# Altium PCB uc3c.PcbDoc
Units mil, origin at the board's own origin, x right, y up, seen from the top; angles counter-clockwise.
Board outline 1082.68 x 1574.8 mil, 2 copper layers (Top Layer, Bottom Layer); 34 components, 23 nets, 237 pads, 76 vias.
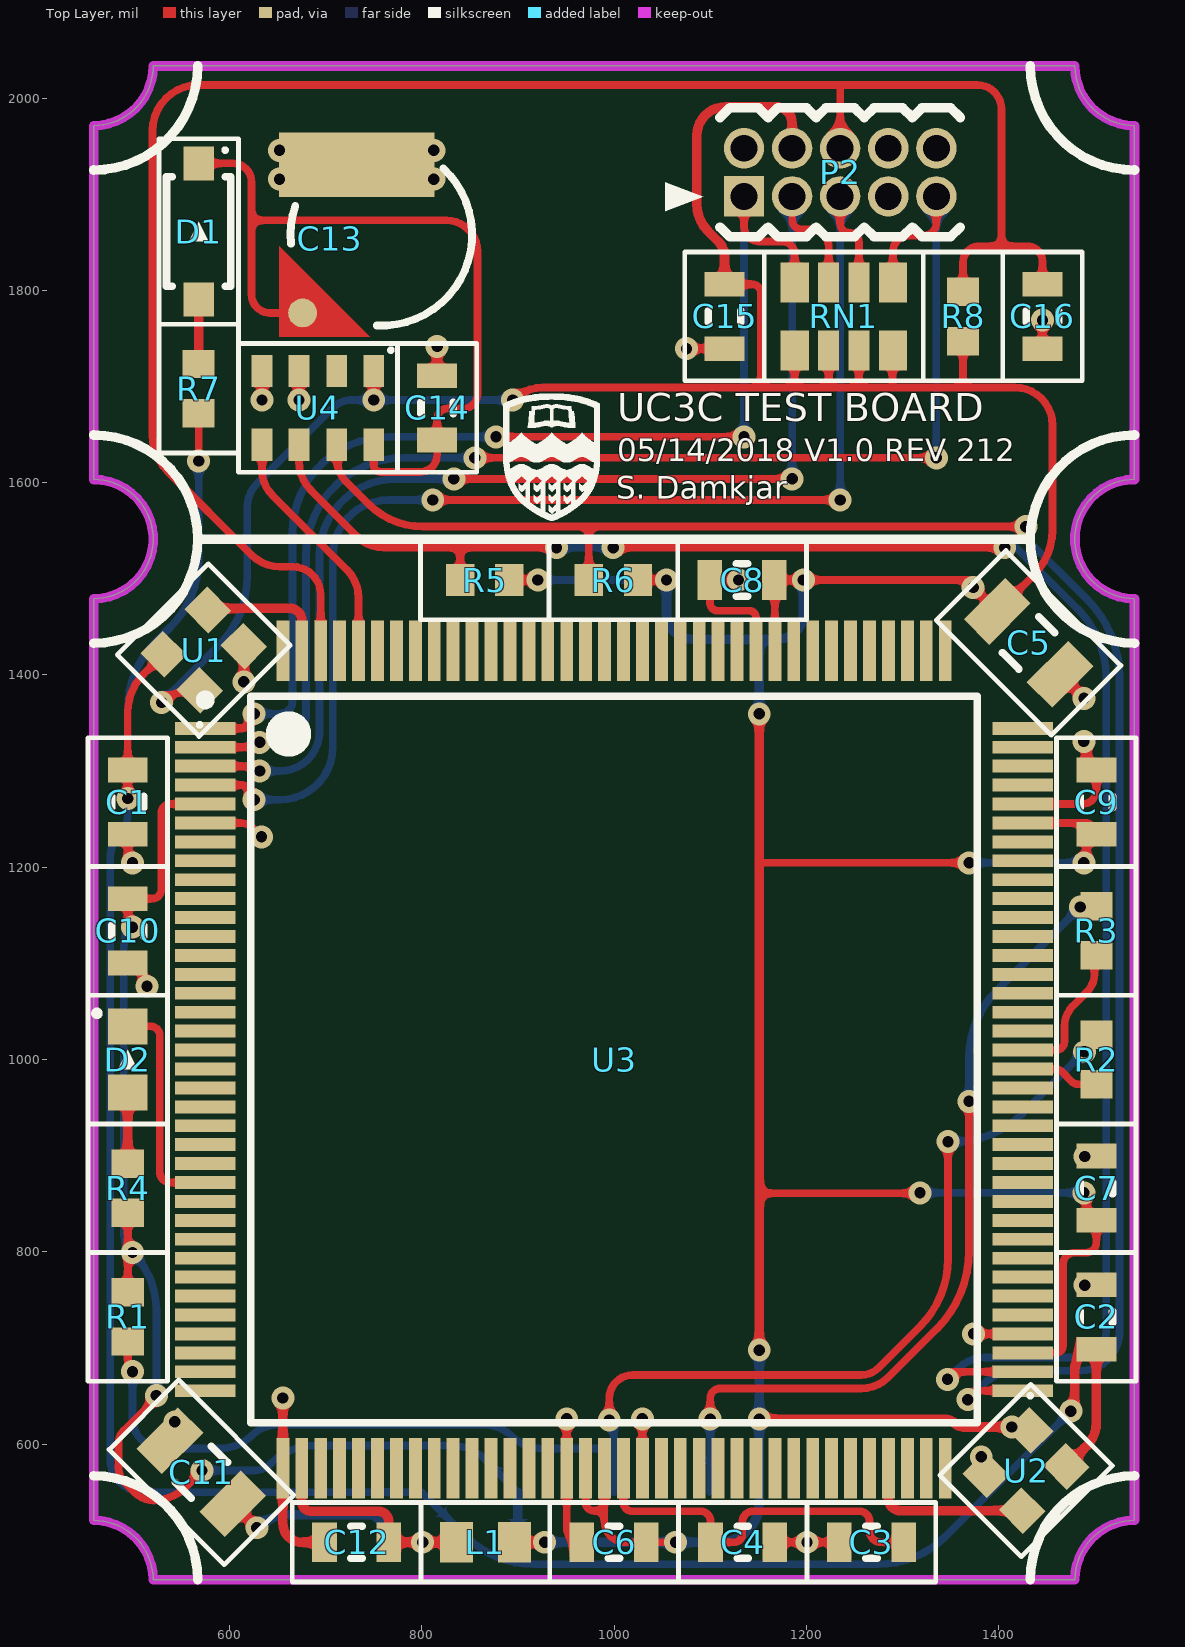
[diagram p0: Top Layer view]
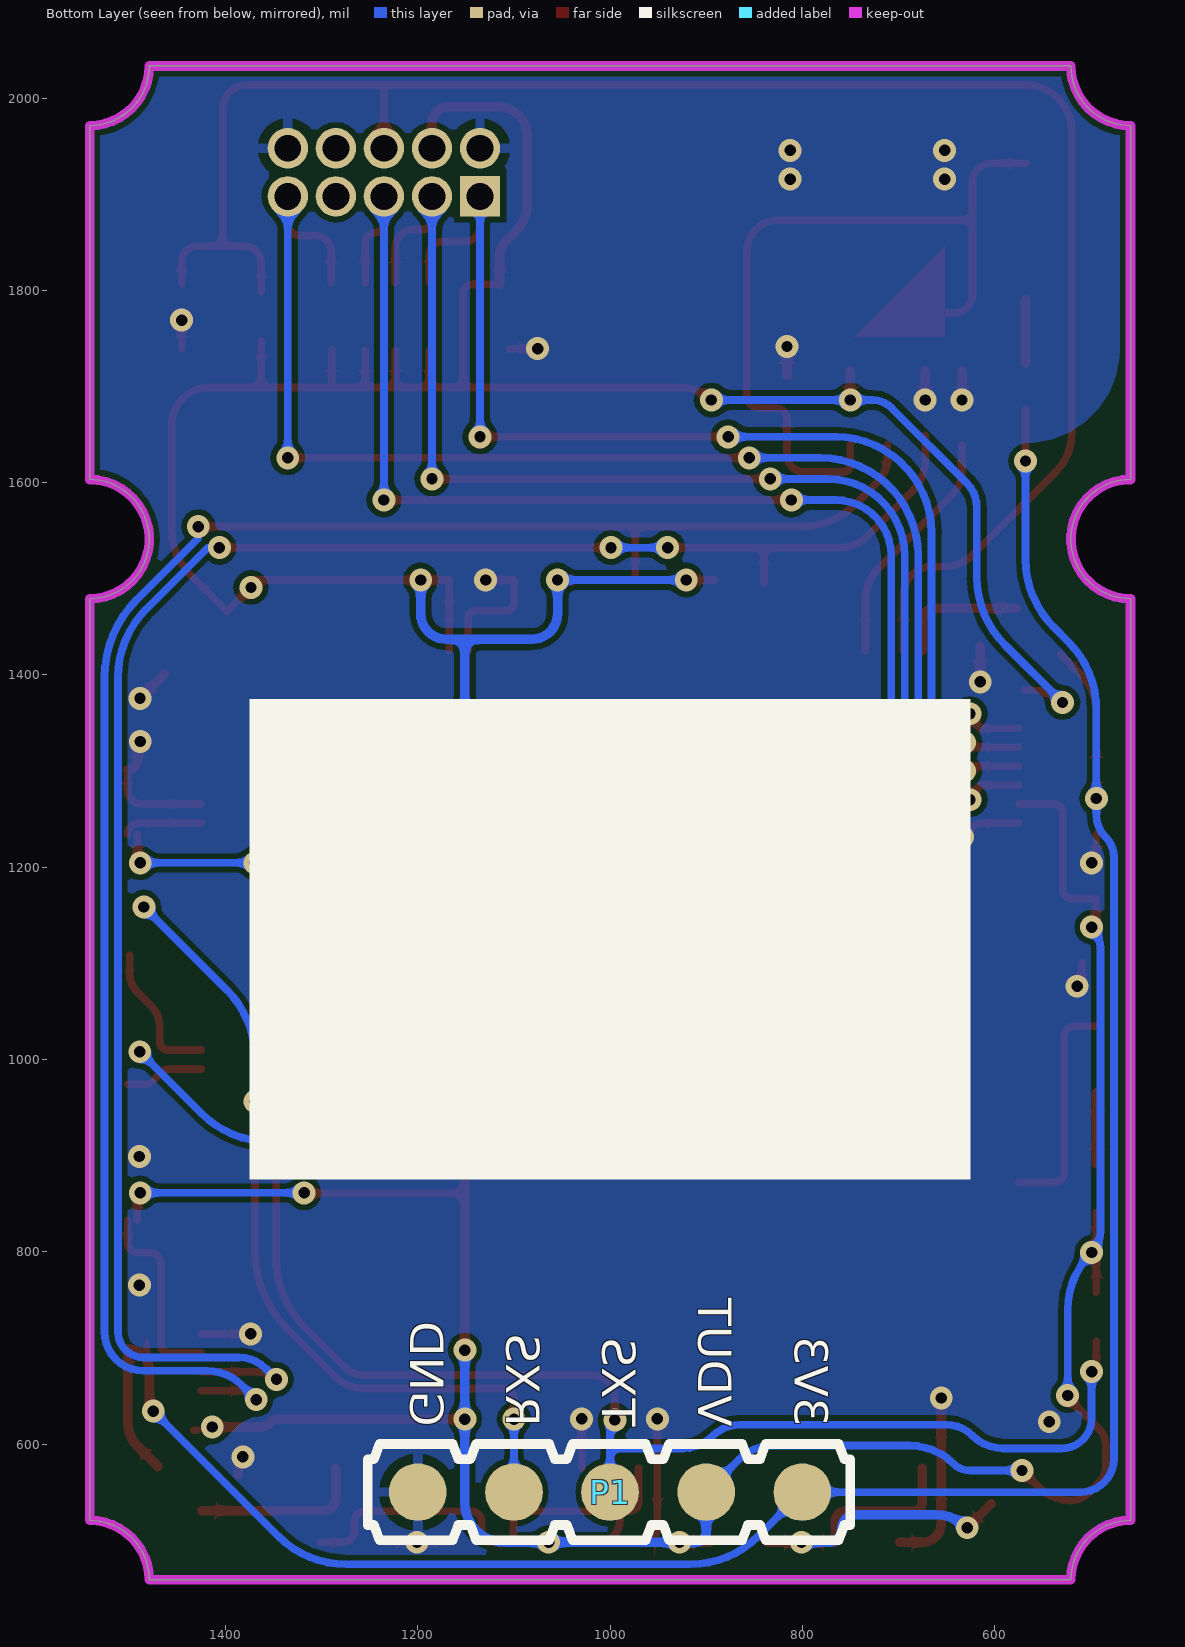
[diagram p1: Bottom Layer view, seen from below]

## Layer stack, top to bottom
Top Solder: solder mask 0.4, Solder Resist, Dk 3.5
Top Layer: signal copper 1.4
Dielectric 1: dielectric 12.6, FR-4, Dk 4.8
Bottom Layer: signal copper 1.4
Bottom Solder: solder mask 0.4, Solder Resist, Dk 3.5

## Board outline
458.66,520.67 458.66,1479.33 ccw(c458.66,1541.34) 458.66,1603.35 458.66,1971.46 ccw(c458.66,2033.46) 520.67,2033.46 1479.33,2033.46 ccw(c1541.34,2033.46) 1541.34,1971.46 1541.34,1603.35 ccw(c1541.34,1541.34) 1541.34,1479.33 1541.34,520.67 ccw(c1541.34,458.66) 1479.33,458.66 520.67,458.66 ccw(c458.66,458.66)

## Design rules (kind name [scope] priority, off if disabled: settings)
AcuteAngle [All] p1: minimum=6.00000000000000E+0001 checktracksonly=FALSE
BoardOutlineClearance [All] p1: gap=7.87 ignorepadtopadclearanceinfootprint=FALSE
Clearance [All] p1: gap=6 ignorepadtopadclearanceinfootprint=FALSE except(0: Arc-Hole Track-Hole SMDPad-Hole THPad-Hole Via-Hole Fill-Hole Poly-Hole Region-Hole Text-Hole)
Clearance ClearanceTop [OnLayer('Component Side')] p2 off: gap=4 ignorepadtopadclearanceinfootprint=FALSE except(0: Arc-Hole Track-Hole SMDPad-Hole THPad-Hole Via-Hole Fill-Hole Poly-Hole Region-Hole Text-Hole)
Clearance ClearanceTop_1 [OnLayer('Signal Layer 1')] p3 off: gap=4 ignorepadtopadclearanceinfootprint=FALSE except(0: Arc-Hole Track-Hole SMDPad-Hole THPad-Hole Via-Hole Fill-Hole Poly-Hole Region-Hole Text-Hole)
Clearance ClearanceTop_2 [OnLayer('Signal Layer 2')] p4 off: gap=4 ignorepadtopadclearanceinfootprint=FALSE except(0: Arc-Hole Track-Hole SMDPad-Hole THPad-Hole Via-Hole Fill-Hole Poly-Hole Region-Hole Text-Hole)
Clearance ClearanceBottom [OnLayer('Solder Side')] p5 off: gap=4 ignorepadtopadclearanceinfootprint=FALSE except(0: Arc-Hole Track-Hole SMDPad-Hole THPad-Hole Via-Hole Fill-Hole Poly-Hole Region-Hole Text-Hole)
ComponentClearance [All] p1: gap=6 collisioncheckmode=3 verticalgap=10 showdistances=FALSE
Height HeightTop [OnLayer('Component Side')] p1: minheight=0 maxheight=1000 prefheight=157.48
Height HeightBottom [OnLayer('Solder Side')] p2: minheight=0 maxheight=157.48 prefheight=157.48
HoleSize [All] p1: absolutevalues=TRUE maxlimit=255.91 minlimit=7.87 maxpercent=80.000 minpercent=20.000
MinimumAnnularRing [All] p1: minimumring=4
MinimumSolderMaskSliver [All] p1: minsoldermaskwidth=3.94
PolygonConnect PolygonConnect_1 [IsVia] p1: connectstyle=Direct reliefconductorwidth=10 reliefentries=4 polygonreliefangle="90 Angle" airgapwidth=10
PolygonConnect [All] p2: connectstyle=Relief reliefconductorwidth=10 reliefentries=4 polygonreliefangle="90 Angle" airgapwidth=10
RoutingVias [All] p1: holewidth=8 width=20 viastyle="Through Hole" minholewidth=11.81 minwidth=23.81 maxholewidth=28 maxwidth=50
SMDEntry [All] p1: side=TRUE corner=FALSE anyangle=FALSE
SMDNeckDown [All] p1: percent=90.000
SMDToCorner [All] p1: distance=0
SMDToPlane [All] p1: distance=0
SilkToSilkClearance [All] p1: silktosilkclearance=6
SilkToSolderMaskClearance [IsPad] p1: minsilkscreentomaskgap=5.12 clearancetoexposedcopper=TRUE
SolderMaskExpansion [All] p1: expansion=0
UnConnectedPin [All] p1:
Width [All] p1: maxlimit=100 minlimit=6 preferedwidth=10 checkconnectedcopper=TRUE
24 further rules are at their usual default settings.

## Components (designator, comment, footprint, x,y, rotation, side; value= is the part's Value field where it differs from the comment)
C1 "Cap" TDK-CGA3E 494.14,1267.72 r90 top value=10000pF
C2 "Cap" TDK-CGA3E 1501.75,732.28 r270 top value=10000pF
C3 "Cap" TDK-CGA3E 1267.72,497.82 r0 top value=2.2µF
C4 "Cap" TDK-CGA3E 1133.86,497.82 r180 top value=470pF
C5 "Cap" TDK-CGA4J 1431.25,1433.36 r135 top value=4.7µF
C6 "Cap" TDK-CGA3E 1000,497.82 r0 top value=1000pF
C7 "Cap" TDK-CGA3E 1501.75,866.14 r270 top value=0.1µF
C8 "Cap" TDK-CGA3E 1133.23,1498.77 r0 top value=0.1µF
C9 "Cap" TDK-CGA3E 1501.75,1267.72 r270 top value=0.1µF
C10 "Cap" TDK-CGA3E 494.14,1133.86 r90 top value=0.1µF
C11 "Cap" TDK-CGA4J 570.78,570.64 r315 top value=4.7µF
C12 "Cap" TDK-CGA3E 732.28,497.82 r0 top value=10000pF
C13 "XH414HG" SKI-XH414HG-IV01E 757.93,1857.87 r180 top value=80mF
C14 "Cap" TDK-CGA3E 815.96,1677.87 r270 top value=0.1µF
C15 "Cap" TDK-CGA3E 1114.96,1772.87 r90 top value=0.1µF
C16 "Cap" TDK-CGA3E 1445.67,1772.87 r270 top value=0.1µF
D1 "1N4148W" DIOD-SOD123 567.93,1861.26 r90 top
D2 "LED" WL-150060XS75000 494.14,1000 r90 top value=BLUE
L1 "Inductor" TDK-MPX1608 866.14,497.82 r180 top value="1 kOhm @ 100MHz"
P1 "319-10-105-30-054000" 319-10-105-30-054000 800,550 r0 bottom
P2 "Header 5x2" SLN-GRPB052 1135.25,1897.87 r0 top
R1 "Res3" PANA-ERJ3EK 494.14,732.28 r90 top value=1k
R2 "Res3" PANA-ERJ3EK 1501.75,1000 r90 top value=33
R3 "Res3" PANA-ERJ3EK 1501.75,1133.86 r90 top value=33
R4 "Res3" PANA-ERJ3EK 494.14,866.14 r270 top value=10k
R5 "Res3" PANA-ERJ3EK 865.51,1498.77 r0 top value=1k
R6 "Res3" PANA-ERJ3EK 999.37,1498.77 r0 top value=1k
R7 "Res3" PANA-ERJ3EK 567.93,1697.87 r270 top value=49.9
R8 "Res3" PANA-ERJ3EK 1363,1772.87 r90 top value=10k
RN1 "Res4 Pack1" PANA-EXB1206 1238.98,1772.87 r270 top value=10k
U1 "ASDMB" ABR-ASDMB 573.24,1425.82 r135 top value=50MHz
U2 "ASDMB" ABR-ASDMB 1428.63,572.49 r315 top value=50MHz
U3 "AT32UC3C0512C" MCP-LQFP144 1000,1000 r0 top
U4 "RTCMK" ABR-RTCMK 691.95,1677.87 r270 top value=32.768kHz

## Footprints (in the part's own frame and the unit in brackets; to place one, negate y for a bottom-side part, rotate by r counter-clockwise, add the part's x,y. Pads: shape width x height; smd on the part's side, far side on the other; paste and mask are expansions set on the pad)
319-10-105-30-054000 [mil]
  round 60 smd: 1(0,0) 2(100,0) 3(200,0) 4(300,0) 5(400,0)
  silkscreen extent -50,-50 452,50, body extent -50,-50 450,50, height 87
ABR-ASDMB [mm] "DFN, 4-Leads, Body 2.00x2.50mm, Pitch 1.65mm, IPC Low Density"
  rect 0.9x0.85 smd: 1(-0.675,0.825) 2(-0.675,-0.825) 3(0.675,-0.825) 4(0.675,0.825)
  silkscreen extent -1.52,-1.7 1.53,1.7, body extent -1,-1.25 1,1.25, height 0.86
ABR-RTCMK [mm]
  rect 0.85x0.55 smd: 1(-0.975,1.475) 2(-0.975,0.5) 3(-0.975,-0.5) 4(-0.975,-1.475) 5(0.975,-1.475) 6(0.975,-0.5) 7(0.975,0.5) 8(0.975,1.475)
  silkscreen extent -1.7,-2.1 1.7,2.1, body extent -1.25,-1.6 1.25,1.6, height 1
DIOD-SOD123 [mm] "SODFL, 2-Leads, Body 1.55x3.70mm, IPC Low Density"
  rect 0.9x0.8 smd: 1(-1.8,0) 2(1.8,0)
  silkscreen extent -2.45,-1.05 2.45,1.05, body extent -1.85,-0.85 1.85,0.85, height 1.45
MCP-LQFP144 [mm] "TSQFP, 144-Leads, Body 20.00x20.00mm, Pitch 0.50mm, IPC Low Density"
  rect 1.6x0.34 smd: 1(-10.8,8.75) 2(-10.8,8.25) 3(-10.8,7.75) 4(-10.8,7.25) 5(-10.8,6.75) 6(-10.8,6.25) 7(-10.8,5.75) 8(-10.8,5.25) 9(-10.8,4.75) 10(-10.8,4.25) 11(-10.8,3.75) 12(-10.8,3.25) 13(-10.8,2.75) 14(-10.8,2.25) 15(-10.8,1.75) 16(-10.8,1.25) 17(-10.8,0.75) 18(-10.8,0.25) 19(-10.8,-0.25) 20(-10.8,-0.75) 21(-10.8,-1.25) 22(-10.8,-1.75) 23(-10.8,-2.25) 24(-10.8,-2.75) 25(-10.8,-3.25) 26(-10.8,-3.75) 27(-10.8,-4.25) 28(-10.8,-4.75) 29(-10.8,-5.25) 30(-10.8,-5.75) 31(-10.8,-6.25) 32(-10.8,-6.75) 33(-10.8,-7.25) 34(-10.8,-7.75) 35(-10.8,-8.25) 36(-10.8,-8.75) 73(10.8,-8.75) 74(10.8,-8.25) 75(10.8,-7.75) 76(10.8,-7.25) 77(10.8,-6.75) 78(10.8,-6.25) 79(10.8,-5.75) 80(10.8,-5.25) 81(10.8,-4.75) 82(10.8,-4.25) 83(10.8,-3.75) 84(10.8,-3.25) 85(10.8,-2.75) 86(10.8,-2.25) 87(10.8,-1.75) 88(10.8,-1.25) 89(10.8,-0.75) 90(10.8,-0.25) 91(10.8,0.25) 92(10.8,0.75) 93(10.8,1.25) 94(10.8,1.75) 95(10.8,2.25) 96(10.8,2.75) 97(10.8,3.25) 98(10.8,3.75) 99(10.8,4.25) 100(10.8,4.75) 101(10.8,5.25) 102(10.8,5.75) 103(10.8,6.25) 104(10.8,6.75) 105(10.8,7.25) 106(10.8,7.75) 107(10.8,8.25) 108(10.8,8.75)
  rect 0.34x1.6 smd: 37(-8.75,-10.8) 38(-8.25,-10.8) 39(-7.75,-10.8) 40(-7.25,-10.8) 41(-6.75,-10.8) 42(-6.25,-10.8) 43(-5.75,-10.8) 44(-5.25,-10.8) 45(-4.75,-10.8) 46(-4.25,-10.8) 47(-3.75,-10.8) 48(-3.25,-10.8) 49(-2.75,-10.8) 50(-2.25,-10.8) 51(-1.75,-10.8) 52(-1.25,-10.8) 53(-0.75,-10.8) 54(-0.25,-10.8) 55(0.25,-10.8) 56(0.75,-10.8) 57(1.25,-10.8) 58(1.75,-10.8) 59(2.25,-10.8) 60(2.75,-10.8) 61(3.25,-10.8) 62(3.75,-10.8) 63(4.25,-10.8) 64(4.75,-10.8) 65(5.25,-10.8) 66(5.75,-10.8) 67(6.25,-10.8) 68(6.75,-10.8) 69(7.25,-10.8) 70(7.75,-10.8) 71(8.25,-10.8) 72(8.75,-10.8) 109(8.75,10.8) 110(8.25,10.8) 111(7.75,10.8) 112(7.25,10.8) 113(6.75,10.8) 114(6.25,10.8) 115(5.75,10.8) 116(5.25,10.8) 117(4.75,10.8) 118(4.25,10.8) 119(3.75,10.8) 120(3.25,10.8) 121(2.75,10.8) 122(2.25,10.8) 123(1.75,10.8) 124(1.25,10.8) 125(0.75,10.8) 126(0.25,10.8) 127(-0.25,10.8) 128(-0.75,10.8) 129(-1.25,10.8) 130(-1.75,10.8) 131(-2.25,10.8) 132(-2.75,10.8) 133(-3.25,10.8) 134(-3.75,10.8) 135(-4.25,10.8) 136(-4.75,10.8) 137(-5.25,10.8) 138(-5.75,10.8) 139(-6.25,10.8) 140(-6.75,10.8) 141(-7.25,10.8) 142(-7.75,10.8) 143(-8.25,10.8) 144(-8.75,10.8)
  silkscreen extent -10.92,-9.6 9.6,9.62, body extent -11,-11 11,11, height 1.6
PANA-ERJ3EK [mm] "Chip Resistor, 2-Leads, Body 1.60x0.85mm, IPC High Density"
  rect 0.75x0.85 smd: 1(-0.65,0) 2(0.65,0)
  silkscreen extent -1.7,-1.05 1.7,1.05, body extent -0.88,-0.48 0.87,0.48, height 0.55
PANA-EXB1206 [mm] "Chip Array, ConvexS, 8-Leads, Pitch 0.80mm,  Body 3.20x1.60mm,  IPC Low Density"
  rect 1.05x0.75 smd: 1(-0.9,1.3) 4(-0.9,-1.3) 5(0.9,-1.3) 8(0.9,1.3)
  rect 1.05x0.55 smd: 2(-0.9,0.4) 3(-0.9,-0.4) 6(0.9,-0.4) 7(0.9,0.4)
  silkscreen extent -1.7,-2.1 1.7,2.1, body extent -0.92,-1.7 0.92,1.7, height 0.6
SKI-XH414HG-IV01E [mm]
  round 0.762 smd: 1(2.078,2.065)
  rect 4.1x1.7 smd: 2(0.65,-1.85)
  Top Layer region: 2.7,0.3 0.3,2.7 2.7,2.7
  silkscreen extent -2.4,-1.75 2.4,2.4, body extent -2.4,-2.4 2.4,2.4, height 1.62
SLN-GRPB052 [mil]
  rect 42x42 hole 28: 1(0,0)
  round 42 hole 28: 2(0,50) 3(50,0) 4(50,50) 5(100,0) 6(100,50) 7(150,0) 8(150,50) 9(200,0) 10(200,50)
  silkscreen extent -25,-42 225,92, body extent -25,-42 225,92, height 130
TDK-CGA3E [mm] "Chip Capacitor, 2-Leads, Body 1.60x0.80mm, IPC Low Density"
  rect 0.65x1.05 smd: 1(-0.85,0) 2(0.85,0)
  silkscreen extent -1.7,-1.05 1.7,1.05, body extent -0.85,-0.45 0.85,0.45, height 0.8
TDK-CGA4J [mm] "Chip Capacitor, 2-Leads, Body 2.00x1.25mm, IPC Low Density"
  rect 0.95x1.55 smd: 1(-1.175,0) 2(1.175,0)
  silkscreen extent -2.15,-1.3 2.15,1.3, body extent -1.1,-0.73 1.1,0.72, height 1.25
TDK-MPX1608 [mm] "Chip Inductor, 2-Leads, Body 1.60x0.80mm, IPC Low Density"
  rect 0.87x1.08 smd: 1(-0.765,0) 2(0.765,0)
  silkscreen extent -1.7,-1.05 1.7,1.05, body extent -0.87,-0.48 0.87,0.47, height 0.75
WL-150060XS75000 [mm] "Chip Diode, 2-Leads, Body 1.60x0.80mm, IPC Low Density"
  rect 0.95x1.05 smd: 1(-0.875,0) 2(0.875,0)
  silkscreen extent -1.7,-1.05 1.7,1.05, body extent -0.8,-0.4 0.8,0.4, height 0.7

## Part data
C1 C2 C12: library part PC-TDK-01883, "CAP CER 10000PF 100V C0G 0603", Manufacturer Part Number=CGA3E1C0G2A103J080AC, Supplier Part Number 1=445-172688-1-ND, Temperature Coefficient=NP0, Tolerance=±5%, Voltage - Rated=100V, Applications=Automotive, Index=1883, LatestRevisionDate=3/16/2016, LatestRevisionNote=..., PackageDescription="Radial Cap, Thru-Hole; 2 Leads; 0.3 in Pin Spacing", PackageReference="0603 (1608 Metric)", Part Number=PC-TDK-01883, Published=3/16/2016, Publisher=AlbertaSat, Supplier 1=Digi-key, Supplier Link=http://www.digikey.ca/product-search/en?keywords=445-172688-1-ND
C3: library part PC-TDK-02725, "CAP CER 2.2UF 6.3V X7R 0603", Manufacturer Part Number=CGA3E1X7R0J225K080AC, Supplier Part Number 1=445-6933-1-ND, Temperature Coefficient=X7R, Tolerance=±10%, Voltage - Rated=6.3V, Applications=Automotive, Index=2725, LatestRevisionDate=2016-03-16, LatestRevisionNote=..., PackageDescription="Radial Cap, Thru-Hole; 2 Leads; 0.3 in Pin Spacing", PackageReference="0603 (1608 Metric)", Part Number=PC-TDK-02725, Published=2016-03-16, Publisher=AlbertaSat, Supplier 1=Digi-key, Supplier Link=http://www.digikey.ca/product-search/en?keywords=445-6933-1-ND
C4: library part PC-TDK-01388, "CAP CER 470PF 250V C0G 0603", Manufacturer Part Number=CGA3E3C0G2E471J080AA, Supplier Part Number 1=445-5746-1-ND, Temperature Coefficient=NP0, Tolerance=±5%, Voltage - Rated=250V, Applications=Automotive, Index=1388, LatestRevisionDate=3/16/2016, LatestRevisionNote=..., PackageDescription="Radial Cap, Thru-Hole; 2 Leads; 0.3 in Pin Spacing", PackageReference="0603 (1608 Metric)", Part Number=PC-TDK-01388, Published=3/16/2016, Publisher=AlbertaSat, Supplier 1=Digi-key, Supplier Link=http://www.digikey.ca/product-search/en?keywords=445-5746-1-ND
C5 C11: library part PC-TDK-02830, "CAP CER 4.7UF 25V X7R 0805", Manufacturer Part Number=CGA4J1X7R1E475K125AC, Supplier Part Number 1=445-6967-1-ND, Temperature Coefficient=X7R, Tolerance=±10%, Voltage - Rated=25V, Applications=Automotive, Index=2830, LatestRevisionDate=3/16/2016, LatestRevisionNote=..., PackageDescription="Radial Cap, Thru-Hole; 2 Leads; 0.3 in Pin Spacing", PackageReference="0805 (2012 Metric)", Part Number=PC-TDK-02830, Published=3/16/2016, Publisher=AlbertaSat, Supplier 1=Digi-key, Supplier Link=http://www.digikey.ca/product-search/en?keywords=445-6967-1-ND
C6: library part PC-TDK-01478, "CAP CER 1000PF 50V NP0 0603", Manufacturer Part Number=CGA3E2NP01H102J080AA, Supplier Part Number 1=445-12385-1-ND, Temperature Coefficient=NP0, Tolerance=±5%, Voltage - Rated=50V, Applications=Automotive, Index=1478, LatestRevisionDate=3/16/2016, LatestRevisionNote=..., PackageDescription="Radial Cap, Thru-Hole; 2 Leads; 0.3 in Pin Spacing", PackageReference="0603 (1608 Metric)", Part Number=PC-TDK-01478, Published=3/16/2016, Publisher=AlbertaSat, Supplier 1=Digi-key, Supplier Link=http://www.digikey.ca/product-search/en?keywords=445-12385-1-ND
C7 C8 C9 C10 C14 C15 C16: library part PC-TDK-02272, "CAP CER 0.1UF 50V X8R 0603", Manufacturer Part Number=CGA3E3X8R1H104K080AB, Supplier Part Number 1=445-12606-1-ND, Temperature Coefficient=X8R, Tolerance=±10%, Voltage - Rated=50V, Applications=Automotive, Index=2272, LatestRevisionDate=3/16/2016, LatestRevisionNote=..., PackageDescription="Radial Cap, Thru-Hole; 2 Leads; 0.3 in Pin Spacing", PackageReference="0603 (1608 Metric)", Part Number=PC-TDK-02272, Published=3/16/2016, Publisher=AlbertaSat, Supplier 1=Digi-key, Supplier Link=http://www.digikey.ca/product-search/en?keywords=445-12606-1-ND
C13: library part PC-SKI-00001, "CAP 80MF 3.3V SURFACE MOUNT", Manufacturer Part Number=XH414HG-IV01E, Supplier Part Number 1=728-1050-1-ND, Voltage - Rated=3.3V, Index=1, LatestRevisionDate=2018-04-25, LatestRevisionNote=..., PackageDescription="Polarized Capacitor (Radial); 2 Leads", PackageReference="0.189\" Dia (4.80mm)", Part Number=PC-SKI-00001, Published=2018-04-25, Publisher=AlbertaSat, Supplier 1=Digi-key, Supplier 2=Mouser, Supplier Link=#https://www.digikey.ca/product-detail/en/seiko-instruments/XH414HG-IV01E/728-1050-1-ND/1889211#, Supplier Part Number 2=628-XH414HG-IV01E
D1: library part 26, "DIODE GEN PURP 100V 300MA SOD123", Current - Peak Pulse=300mA, Manufacturer Part Number=1N4148W-7-F, Supplier Part Number 1=1N4148W-FDICT-ND, Voltage - DC Reverse="1.25V @ 150mA", Voltage - Reverse Standoff (Typ)=100V, Code_JEDEC=DO-214-AB, LatestRevisionDate=17-Jul-2002, LatestRevisionNote="Re-released for DXP Platform.", PackageDescription="DO-214-AB/SMC; 2 C-Bend Leads; Body 7.9 x 5.9 mm, inc. leads (LxW)", PackageReference=DIOD-SOD123, PackageVersion=Sep-1996, Part Number=26, Published=8-Jun-2000, Publisher="Altium Limited", Supplier 1=Digi-Key, Supplier Link=#https://www.digikey.ca/product-detail/en/diodes-incorporated/1N4148W-7-F/1N4148W-FDICT-ND/815280#
D2: library part 4, "LED BLUE CLEAR 0603 SMD", Manufacturer Part Number=150060BS75000, Supplier Part Number 1=732-4966-1-ND, Brightness=145mcd, LatestRevisionDate=08-Jul-2005, LatestRevisionNote="Mech Layer 1 removed.", PackageDescription="LED; 2 Leads", PackageReference=WL-150060XS75000, Part Number=4, Published=8-Jun-2000, Publisher="Altium Limited", Supplier 1=Digi-Key, Supplier Link=http://www.digikey.ca/product-search/en?keywords=732-4966-1-ND
L1: library part PL-TDK-02954, "FERRITE BEAD 1 KOHM 0603 1LN", Current - Rated=800mA, Manufacturer Part Number=MPZ1608S102ATD25, Supplier Part Number 1=445-172890-1-ND, Applications=Automotive, Code_IEC=1608, Code_JEITA=0603, Index=2954, LatestRevisionDate=7/8/2017, LatestRevisionNote=..., PackageDescription="Chip Inductor, 2-Leads, Body 1.60x0.80mm, IPC Low Density", PackageReference="0603 (1608 Metric)", Part Number=PL-TDK-02954, Published=7/8/2017, Publisher=AlbertaSat, Supplier 1=Digi-key, Supplier 2=Mouser, Supplier Link=#https://www.digikey.ca/product-detail/en/tdk-corporation/MPZ1608S102ATD25/445-172890-1-ND/5040521#, Supplier Part Number 2=810-MPZ1608S102ATD25
P1: library part PP-MMM-00002, "LOW PROFILE SLC TARGET CONNECTOR", Supplier Part Number 1=ED10781-ND, Index=2, LatestRevisionDate=2018-05-10, LatestRevisionNote=..., Manufacturer Part Number=319-10-105-30-054000, Part Number=PP-MMM-00002, Published=2018-05-10, Publisher=AlbertaSat, Supplier 1=Digi-key, Supplier 2=Mouser, Supplier Link=#https://www.digikey.ca/product-detail/en/mill-max-manufacturing-corp/319-10-105-30-054000/ED10781-ND/6243896#, Supplier Part Number 2=575-3191010530054000
P2: library part PP-SLN-00017, "CONN HEADER .050\"\" 10PS DL PCB AU", Manufacturer Part Number=GRPB052VWVN-RC, Supplier Part Number 1=S9015E-05-ND, Index=17, LatestRevisionDate=3/16/2016, LatestRevisionNote=..., Number of Positions=10, Number of Rows=2, PackageDescription="CONN HEADER .050\"\" 10PS DL PCB AU", PackageReference=SLN-GRPB052, Part Number=PP-SLN-00017, Published=3/16/2016, Publisher=AlbertaSat, Supplier 1=Digi-key, Supplier Link=http://www.digikey.ca/product-search/en?keywords=S9015E-05-ND
R1 R5 R6: library part 15398, "RES SMD 1K OHM 1% 1/10W 0603", Manufacturer Part Number=ERJ-3EKF1001V, Power="0.1W, 1/10W", Supplier Part Number 1=P1.00KHCT-ND, Temperature Coefficient=±100ppm/°C, Tolerance=±1%, LatestRevisionDate=29-May-2009, LatestRevisionNote="IPC-7351 Footprint Added.", PackageDescription="Chip Resistor, 2-Leads, Body 1.60x0.80mm, IPC Low Density", PackageReference="0603 (1608 Metric)", Part Number=15398, Published=8-Jun-2000, Publisher="Altium Limited", Supplier 1=Digi-Key, Supplier Link=http://www.digikey.ca/product-search/en?keywords=P1.00KHCT-ND
R2 R3: library part 13588, "RES SMD 33 OHM 1% 1/10W 0603", Manufacturer Part Number=ERJ-3EKF33R0V, Power="0.1W, 1/10W", Supplier Part Number 1=P33.0HCT-ND, Temperature Coefficient=±100ppm/°C, Tolerance=±1%, LatestRevisionDate=29-May-2009, LatestRevisionNote="IPC-7351 Footprint Added.", PackageDescription="Chip Resistor, 2-Leads, Body 1.60x0.80mm, IPC Low Density", PackageReference="0603 (1608 Metric)", Part Number=13588, Published=8-Jun-2000, Publisher="Altium Limited", Supplier 1=Digi-Key, Supplier Link=http://www.digikey.ca/product-search/en?keywords=P33.0HCT-ND
R4 R8: library part 17203, "RES SMD 10K OHM 1% 1/10W 0603", Manufacturer Part Number=ERJ-3EKF1002V, Power="0.1W, 1/10W", Supplier Part Number 1=P10.0KHCT-ND, Temperature Coefficient=±100ppm/°C, Tolerance=±1%, LatestRevisionDate=29-May-2009, LatestRevisionNote="IPC-7351 Footprint Added.", PackageDescription="Chip Resistor, 2-Leads, Body 1.60x0.80mm, IPC Low Density", PackageReference="0603 (1608 Metric)", Part Number=17203, Published=8-Jun-2000, Publisher="Altium Limited", Supplier 1=Digi-Key, Supplier Link=http://www.digikey.ca/product-search/en?keywords=P10.0KHCT-ND
R7: library part 13734, "RES SMD 49.9 OHM 1% 1/10W 0603", Manufacturer Part Number=ERJ-3EKF49R9V, Power="0.1W, 1/10W", Supplier Part Number 1=P49.9HCT-ND, Temperature Coefficient=±100ppm/°C, Tolerance=±1%, LatestRevisionDate=29-May-2009, LatestRevisionNote="IPC-7351 Footprint Added.", PackageDescription="Chip Resistor, 2-Leads, Body 1.60x0.80mm, IPC Low Density", PackageReference="0603 (1608 Metric)", Part Number=13734, Published=8-Jun-2000, Publisher="Altium Limited", Supplier 1=Digi-Key, Supplier Link=http://www.digikey.ca/product-search/en?keywords=P49.9HCT-ND
RN1: library part 19842, "RES ARRAY 4 RES 10K OHM 1206", Manufacturer Part Number=EXB-38V103JV, Power=62.5mW, Supplier Part Number 1=Y9103CT-ND, Temperature Coefficient=±200ppm/°C, Tolerance=±5%, Code_JEDEC=MS-012-AC, PackageDescription="Chip Array, ConvexS, 8-Leads, Pitch 0.80mm,  Body 3.20x1.60mm,  IPC Low Density", PackageReference="1206 (3216 Metric), Convex, Long Side Terminals", Part Number=19842, Sim Note="Enter the Resistance value into parameter field.", Supplier 1=Digi-Key, Supplier Link=http://www.digikey.ca/product-search/en?keywords=Y9103CT-ND
U1 U2: library part PU-ABR-00030, "OSC MEMS 50.000MHZ CMOS SMD", Manufacturer Part Number=ASDMB-50.000MHZ-XY-T, Supplier Part Number 1=535-11167-1-ND, Tolerance=±10ppm, Index=30, LatestRevisionDate=2017-10-24, LatestRevisionNote=..., PackageDescription="DFN, 4-Leads, Body 2.00x2.50mm, Pitch 1.65mm, IPC Low Density", PackageReference="4-SMD, No Lead", Part Number=PU-ABR-00030, Published=2017-10-24, Publisher=AlbertaSat, Supplier 1=Digi-key, Supplier 2=Mouser, Supplier Link=http://www.digikey.ca/product-search/en?keywords=535-11167-1-ND, Supplier Part Number 2=815-ASDMB-50-XY-T
U3: library part PU-MCP-00005, "IC MCU 32BIT 512KB FLASH 144LQFP", Manufacturer Part Number=AT32UC3C0512C-ALZR, Operating Temperature="-40°C ~ 125°C (TA)", Supplier Part Number 1="AT32UC3C0512C-ALZRTR-ND  / AT32UC3C0512C-ALZRTR-ND", Core Processor=AVR, Core Size=32-Bit, Index=5, LatestRevisionDate=2018-04-18, LatestRevisionNote=..., PackageReference=144-LQFP, Part Number=PU-MCP-00005, Program Memory Size="512KB (512K x 8)", Published=2018-04-18, Publisher=AlbertaSat, RAM Size="64K x 8", Speed=50MHz, Supplier 1=Digi-key, Supplier 2=Verical, Supplier Link=#https://www.digikey.ca/product-detail/en/microchip-technology/AT32UC3C0512C-ALZR/AT32UC3C0512C-ALZRTR-ND/4517167#, Supplier Part Number 2=AT32UC3C0512C-ALZR
U4: library part PU-ABR-00037, "IC RTC CLK/CALENDAR I2C 8-SMT", Manufacturer Part Number=AB-RTCMK-32.768KHZ-T3, Supplier Part Number 1=535-11916-1-ND, Index=37, LatestRevisionDate=4/23/2018, LatestRevisionNote=..., PackageDescription="8-SMD Module", PackageReference="8-SMD Module", Part Number=PU-ABR-00037, Published=4/23/2018, Publisher=AlbertaSat, Supplier 1=Digi-key, Supplier 2=Mouser, Supplier Link=https://www.digikey.ca/product-detail/en/abracon-llc/AB-RTCMK-32.768KHZ-T3/535-11916-1-ND/3601050, Supplier Part Number 2=815-AB-RTCMK-32.7KT3

## Via types
v1: diameter 23.81, hole 11.81, Top Layer to Bottom Layer, tented both sides, 76 vias

## Nets (pads, with @x,y where several pads share a name; then routed paths per layer and width w, separated by ;. In a path a pad name is that pad's centre, name@x,y a point inside that pad or via, vN(x,y) a via of type N, cw(c..) or ccw(c..) an arc to the next point about the centre after c; other vN are vias at no path point)
3V3: C1.2 C2.2 P1.1 R7.2 U1.4 U2.4 | length 2600.7
  Top Layer w8: v1(494.14,1271.53) C1.2 494.14,1361.18 cw(c549.98,1361.18) 510.49,1400.66 U1.4 ; v1(567.93,1622.63) R7.2@567.93,1676.11
  Top Layer w10: U2.4 1491.64,597.92 ccw(c1467.24,622.32) 1501.75,622.32 C2.2 1500.54,698.82 ccw(c1500.54,677.43) 1479.15,677.43 v1@1479.15,634.18
  Bottom Layer w8: v1(567.93,1622.63) 567.93,1520.59 cw(c467.93,1520.59) 538.64,1449.88 523.43,1434.67 ccw(c594.14,1363.96) 494.14,1363.96 v1(494.14,1271.53) 494.14,1254.44 cw(c461.6,1254.44) 484.61,1231.43 ccw(c505.61,1210.42) 475.91,1210.42 475.91,584.71 ccw(c510.61,584.71) 510.61,550 P1.1 845.81,504.19 ccw(c916.52,574.9) 916.52,474.9 1274.45,474.9 ccw(c1274.45,574.9) 1345.16,504.19 v1(1475.15,634.18)
#RESET2: C16.1 P2.6 R8.2 U3.142 | length 1918.8
  Top Layer w8: U3.142 694.88,1483.48 ccw(c665.79,1483.48) 665.79,1512.57 652.51,1512.57 cw(c652.51,1554.57) 622.81,1524.87 535.54,1612.14 cw(c573.28,1649.88) 519.91,1649.88 519.91,1965.99 cw(c567.66,1965.99) 567.66,2013.75 1377.82,2013.75 cw(c1377.82,1988.52) 1403.04,1988.52 1403.04,1845.91 ; P2.6 1235.25,2011.84 ; R8.2 1363,1829.11 cw(c1379.79,1829.11) 1379.79,1845.91 1403.04,1845.91 ; C16.1 1445.67,1830.12 ccw(c1429.89,1830.12) 1429.89,1845.91 1403.04,1845.91
BLINKY2: D2.2 U3.25 | length 234.3
  Top Layer w8: D2.2 518.06,1034.45 cw(c518.06,1024.99) 527.52,1024.99 527.52,883 ccw(c538.48,883) 538.48,872.05 U3.25
GNDB: C1.1 C2.1 C3.1 C4.1 C5.1 C6.1 C7.1 C8.1 C9.1 C10.1 C11.1 C12.1 C13.2 C14.1 C15.1 C16.2 P1.5 P2.2 P2.10 U1.2 U2.2 U3.6 U3.37 U3.52 U3.56 U3.76 U3.104 U3.119 U4.3 U4.4 | length 1132.4
  Top Layer w8: v1@494.14,1204.6 C1.1 ; v1@509.14,1070.74 C10.1@509.14,1100.39 ; U3.6 611.42,1246.06 cw(c611.42,1228.39) 623.91,1240.89 v1(633.27,1231.54) ; v1(950.79,626.14) 950.79,513.57 ccw(c966.54,513.57) C6.1 ; U3.56 v1(1029.53,626.14) ; v1(1075.31,1739.41) C15.1@1104.96,1739.41 ; v1(1129.42,1498.77) C8.1 1099.76,1475.26 ccw(c1108.33,1475.26) 1108.33,1466.69 1141.05,1466.69 cw(c1141.05,1460.11) 1147.64,1460.11 U3.119 ; C4.1 v1(1200.79,497.82) C3.1 ; v1(1373.86,714.57) U3.76 ; U3.104 1487.43,1265.75 ccw(c1487.43,1280.06) 1501.75,1280.06 C9.1 ; C16.2 v1(1445.67,1769.06)
  Top Layer w10: v1(615,1392.88) U1.2 ; v1(633.87,1685.94) U4.4 ; v1(655.51,647.94) U3.37 655.51,517.52 ccw(c675.21,517.52) 675.21,497.82 C12.1 ; v1(672.26,1685.94) U4.3 ; C14.1 v1(815.96,1741.65) ; U2.2 U2.2@1386.87,574.49 ; C5.1 v1(1488.92,1375.69) ; v1@1491.75,1330.83 1491.75,1311.18 ccw(c1501.75,1311.18) C9.1
  Bottom Layer w10: v1@613.94,1390.31 ccw(c611.37,1392.88) v1(615,1392.88)
  other v1: 1381.95,586.71 543.14,623.23 1489.65,765.29 1489.65,899.15 514.14,1076.24 499.14,1204.6 1488.75,1330.83 652.02,1915.71 812.65,1915.71 652.02,1945.71 812.65,1945.71
HFXIN(0)2: U2.3 U3.69 | length 177.8
  Top Layer w10: U3.69 1285.43,543.09 ccw(c1297.79,543.09) 1297.79,530.73 U2.3
HFXIN(1)2: U1.3 U3.143 | length 136.5
  Top Layer w10: U1.3@577.42,1469.27 662.84,1469.27 cw(c662.84,1456.91) 675.2,1456.91 U3.143
LFXIN2: U3.140 U4.5 | length 252.5
  Top Layer w8: U4.5 633.87,1612.8 ccw(c670.54,1612.8) 644.61,1586.88 722.12,1509.37 cw(c692.82,1480.08) 734.25,1480.08 U3.140
NetC3_2: C3.2 C4.2 U3.55 | length 406.6
  Top Layer w8: U3.55 1009.84,539.12 ccw(c1018.82,539.12) 1018.82,530.14 1089.89,530.14 cw(c1089.89,519.63) 1100.39,519.63 C4.2 1124.95,497.82 ccw(c1124.95,506.4) 1133.53,506.4 1133.53,519.06 cw(c1144.62,519.06) 1144.62,530.14 1255.31,530.14 cw(c1255.31,519.68) 1265.77,519.68 1265.77,509.61 ccw(c1277.57,509.61) 1277.57,497.82 C3.2
NetC11_2: C11.2 C12.2 L1.2 U3.38 | length 456.8
  Top Layer w10: C11.2 v1(628.45,512.97) ; U3.38 675.2,539.8 ccw(c685,539.8) 685,530 755,530 cw(c755,519.25) 765.75,519.25 C12.2 v1(800.89,497.82) L1.2
  Bottom Layer w10: v1(628.45,512.97) cw(c661.33,480.09) 661.33,526.59 744.02,526.59 cw(c744.02,511.6) 759,511.6 ccw(c772.79,511.6) 759.91,506.67 ccw(c772.79,511.6) 772.79,497.82 v1(800.89,497.82)
NetC13_1: C13.1 C14.2 D1.2 U4.8 | length 844.5
  Top Layer w8: D1.2 603.68,1932.12 cw(c603.68,1912.87) 622.93,1912.87 622.93,1872.87 ; C13.1 642.16,1776.57 cw(c642.16,1795.81) 622.93,1795.81 622.93,1872.87 ; U4.8 750.02,1618.36 ccw(c757.18,1618.36) 757.18,1611.2 798.23,1611.2 ccw(c798.23,1628.93) 815.96,1628.93 C14.2 815.96,1666.22 cw(c826.84,1666.22) 826.84,1677.1 843.13,1677.1 ccw(c843.13,1691.9) 857.93,1691.9 857.93,1840.62 ccw(c825.68,1840.62) 825.68,1872.87 622.93,1872.87
NetD1_1: D1.1 R7.1 | length 65.6
  Top Layer w10: R7.1@567.93,1724.83 D1.1
NetD2_1: D2.1 R4.1 | length 73.8
  Top Layer w10: R4.1 D2.1
NetP1_3: P1.3 R1.1 R2.2 | length 1446.2
  Top Layer w8: R1.1 494.14,687.43 ccw(c511.21,687.43) v1(499.14,675.36) ; v1(995,625) 995,647.39 cw(c1019.48,647.39) 1019.48,671.87 1257.22,671.87 ccw(c1257.22,697.67) 1275.45,679.42 ; 1275.46,679.43 1318.09,722.06 ccw(c1247.37,792.77) 1347.37,792.77 v1(1347.37,914.61)
  Bottom Layer w8: v1(499.14,675.36) 499.14,626.45 ccw(c530.13,626.45) 530.13,595.45 590.74,595.45 ccw(c590.74,641.37) 623.21,608.9 cw(c650.24,581.87) 650.24,620.1 864.63,620.1 cw(c864.63,579.32) 893.46,608.16 ccw(c924.13,638.83) 924.13,595.45 1000,595.45 ; v1(995,625) 1000,620 1000,595.45 ; P1.3 1000,595.45 ; v1(1347.37,914.61) 1354.35,914.61 ccw(c1354.35,1014.61) 1425.06,943.9 v1(1489.22,1008.06)
NetP1_4: P1.4 R3.2 | length 854.4
  Top Layer w8: v1(1100,625.95) 1100,647.39 cw(c1110.48,647.39) 1110.48,657.87 1257.22,657.87 ccw(c1257.22,697.67) 1285.36,669.53 1335.89,720.06 ccw(c1255.28,800.67) 1369.28,800.67 v1(1369.28,956.52)
  Bottom Layer w8: P1.4 v1(1100,625.95) ; v1(1369.28,956.52) 1369.28,1001.55 cw(c1469.28,1001.55) 1398.57,1072.26 v1(1484.92,1158.61)
NetR2_1: R2.1 U3.90 | length 82.3
  Top Layer w8: U3.90 1458.65,990.16 cw(c1458.65,979.33) 1466.31,986.98 1476.82,976.47 ccw(c1481.8,981.46) 1481.8,974.41 R2.1
NetR3_1: R3.1 U3.91 | length 148.5
  Top Layer w8: U3.91 1459.8,1009.84 ccw(c1459.8,1018.55) 1468.51,1018.55 1468.51,1034.27 cw(c1499.3,1034.27) 1477.53,1056.04 1492.27,1070.78 ccw(c1474.2,1088.84) 1499.75,1088.84 R3.1@1499.75,1108.27
SCL2: R5.1 U3.74 U4.6 | length 1971.9
  Top Layer w8: U4.6@672.26,1636.58 672.26,1622.23 ccw(c714.76,1622.23) 684.71,1592.17 733.01,1543.87 ccw(c760.6,1571.46) 760.6,1532.44 839.92,1532.44 ; U4.6 U4.6@672.26,1649.49 ; R5.1@839.92,1495.87 R5.1 839.92,1532.44 ; v1(940.14,1532.44) 839.92,1532.44 ; v1(999.03,1532.44) v1(1406.43,1532.44) ; v1(1346.94,667.29) cw(c1354.84,667.29) 1354.84,675.2 U3.74
  Bottom Layer w8: v1(940.14,1532.44) v1(999.03,1532.44) ; v1(1346.94,667.29) 1358.35,678.71 cw(c1385.91,651.15) 1385.91,690.12 1485.33,690.12 ccw(c1485.33,716.64) 1511.85,716.64 1511.85,1397.61 ccw(c1411.85,1397.61) 1482.56,1468.32 1418.43,1532.44 v1(1406.43,1532.44)
SDA2: R6.1 U3.73 U4.7 | length 1946.3
  Top Layer w8: U4.7 711.63,1624.57 ccw(c744.93,1624.57) 721.38,1601.02 744.72,1577.68 ; 744.74,1577.66 ccw(c801.05,1634.02) 801.05,1554.35 973.78,1554.35 ; R6.1 973.78,1554.35 ; v1(1368.02,646.21) cw(c1377.32,646.21) 1377.32,655.51 U3.73 ; v1(1428.33,1554.35) 973.78,1554.35
  Bottom Layer w8: v1(1368.02,646.21) 1382.97,661.17 cw(c1419.08,625.06) 1419.08,676.12 1485.33,676.12 ccw(c1485.33,716.64) 1525.85,716.64 1525.85,1397.61 ccw(c1411.85,1397.61) 1492.46,1478.22 1428.33,1542.34 v1(1428.33,1554.35)
TCK2: P2.1 RN1.4 U3.1 | length 1189
  Top Layer w8: U3.1 615.01,1344.49 625.65,1355.13 v1(625.65,1359.68) ; v1(877.18,1647.73) v1(1135.25,1647.73) ; P2.1 1135.25,1866.5 ccw(c1150.87,1866.5) 1150.87,1850.88 1174.97,1850.88 cw(c1174.97,1838.05) 1187.8,1838.05 RN1.4
  Bottom Layer w8: v1(625.65,1359.68) 652.67,1359.68 ccw(c652.67,1372.57) 665.57,1372.57 665.57,1547.73 cw(c765.57,1547.73) 765.57,1647.73 v1(877.18,1647.73) ; v1(1135.25,1647.73) P2.1
TDI2: P2.9 RN1.1 U3.2 | length 1397.3
  Top Layer w8: U3.2 626.31,1324.8 v1(631.37,1329.87) ; v1(855.28,1625.82) v1(1335.25,1625.82) ; RN1.1 1290.16,1840.47 cw(c1306.61,1840.47) 1306.61,1856.92 1322.05,1856.92 ccw(c1322.05,1870.13) 1335.25,1870.13 P2.9
  Bottom Layer w8: v1(631.37,1329.87) 652.67,1329.87 ccw(c652.67,1356.76) 679.57,1356.76 679.57,1524.05 cw(c781.34,1524.05) 781.34,1625.82 v1(855.28,1625.82) ; v1(1335.25,1625.82) P2.9
TDO2: P2.3 RN1.3 U3.3 | length 1274
  Top Layer w8: U3.3 626.31,1305.12 v1(631.37,1300.05) ; v1(833.37,1603.91) v1(1185.25,1603.91) ; P2.3 1185.25,1873.46 ccw(c1195.39,1873.46) 1195.39,1863.32 1205.13,1863.32 cw(c1205.13,1845.22) 1223.23,1845.22 RN1.3
  Bottom Layer w8: v1(631.37,1300.05) 652.67,1300.05 ccw(c652.67,1340.95) 693.57,1340.95 693.57,1524.05 cw(c773.43,1524.05) 773.43,1603.91 v1(833.37,1603.91) ; v1(1185.25,1603.91) P2.3
TMS2: P2.5 RN1.2 U3.4 | length 1349.3
  Top Layer w8: U3.4 615.01,1285.43 625.65,1274.79 v1(625.65,1270.24) ; v1(811.46,1582.01) v1(1235.25,1582.01) ; P2.5 1235.25,1869.46 ccw(c1244.6,1869.46) 1244.6,1860.12 cw(c1244.6,1849.99) 1254.73,1849.99 RN1.2
  Bottom Layer w8: v1(625.65,1270.24) 652.67,1270.24 ccw(c652.67,1325.14) 707.57,1325.14 707.57,1524.05 cw(c765.53,1524.05) 765.53,1582.01 v1(811.46,1582.01) ; v1(1235.25,1582.01) P2.5
VB: C5.2 C6.2 C7.2 C8.2 C9.2 C10.2 C15.2 L1.1 P1.2 P2.4 R1.2 R4.2 R5.2 R6.2 R8.1 RN1.5 RN1.6 RN1.7 RN1.8 U1.1 U2.1 U3.5 U3.53 U3.54 U3.75 U3.103 U3.118 U4.1 | length 6931.2
  Top Layer w8: R1.2 R4.2 ; v1@494.14,1137.67 C10.2 519.64,1167.32 ccw(c519.64,1176.78) 529.1,1176.78 529.1,1256.5 cw(c538.34,1256.5) 538.34,1265.75 U3.5 ; v1(524,650.44) ccw(c526.32,650.44) 524.68,648.79 490.33,614.44 ccw(c504.26,600.51) 484.55,600.51 484.55,575.64 ccw(c506.61,575.64) 491.02,560.04 501.54,549.51 ccw(c521.28,569.25) 521.28,541.34 ccw(c521.28,587.31) 553.79,554.8 v1(571.47,572.49) ; v1(529.44,1371.42) 529.77,1371.42 cw(c560.29,1340.9) 560.29,1384.07 U1.1 ; R5.2 v1(920.75,1498.77) ; v1(894.58,1685.94) cw(c926.2,1654.32) 926.2,1699.04 1152.79,1699.04 ; U3.53 970.47,538.98 ccw(c978.78,538.98) 978.78,530.67 989.98,530.67 ; U3.54 989.98,574.8 989.98,530.67 ; R6.2 v1(1054.61,1498.77) ; v1(1063.97,497.82) C6.2 1011.93,497.82 cw(c1011.93,519.77) 989.98,519.77 989.98,530.67 ; C15.2 1143.78,1806.34 cw(c1143.78,1797.32) 1152.79,1797.32 1152.79,1699.04 ; 1151.1,860.86 1318.2,860.86 v1(1318.2,861.31) ; 1151.1,1204.99 1151.1,1204.6 v1(1369.31,1204.6) ; U3.118 1167.32,1498.77 v1(1196.97,1498.77) 1365.84,1498.77 cw(c1365.84,1491.03) v1(1373.58,1491.03) C5.2 1436.91,1504.44 ccw(c1390.62,1550.72) 1456.08,1550.72 1456.08,1659.93 ccw(c1416.96,1659.93) 1416.96,1699.04 1363,1699.04 ; RN1.5 1187.8,1699.04 ; RN1.6 1223.23,1699.04 ; RN1.7 1254.73,1699.04 ; 1289.58,1699.61 RN1.8@1289.58,1738 ; R8.1 1363,1699.04 ; U3.75 1459.73,694.88 ccw(c1459.73,702.14) 1466.99,702.14 1466.99,786.97 cw(c1479.11,786.97) 1479.11,799.08 1491.09,799.08 ccw(c1491.09,809.75) 1501.75,809.75 C7.2 ; U3.103 1489.94,1246.06 cw(c1489.94,1234.25) C9.2 ; U2.1@1429.69,614.25 U2.1 ; C7.2@1491.75,832.68 v1@1491.75,861.31 ; v1@1491.75,1204.6 C9.2@1491.75,1234.25 ; 1152.79,1699.04 1187.8,1699.04 ; 1187.8,1699.04 1223.23,1699.04 ; 1223.23,1699.04 1254.73,1699.04 ; 1254.73,1699.04 1363,1699.04
  Top Layer w10: v1(750.02,1685.94) U4.1 ; L1.1 v1(927.82,497.82) ; C15.2 1114.96,1835.02 ccw(c1092.2,1835.02) 1108.3,1851.12 1098,1861.42 cw(c1126.56,1889.98) 1086.17,1889.98 1086.17,1961.14 cw(c1116.03,1961.14) 1116.03,1991 1168.42,1991 cw(c1168.42,1974.17) 1185.25,1974.17 P2.4 ; v1(1151.1,625.95) 1343.82,625.95 cw(c1343.82,611.1) 1354.32,621.6 ccw(c1363.55,630.83) 1363.55,617.77 v1(1413.83,617.77) ; v1(1151.1,697.74) 1151.1,860.86 1151.1,1204.6 ; 1151.1,1204.99 v1(1151.1,1359.53)
  Bottom Layer w8: v1(499.14,1137.67) ccw(c521.43,1115.38) 489.91,1115.38 489.91,821.5 ccw(c521.43,821.5) v1(499.14,799.21) cw(c439.12,739.19) 524,739.19 v1(524,650.44) ; v1(529.44,1371.42) 589.17,1431.16 ccw(c518.46,1501.87) 618.46,1501.87 618.46,1574.38 cw(c653.61,1574.38) 628.76,1599.23 707.34,1677.81 cw(c726.97,1658.18) 726.97,1685.94 v1(750.02,1685.94) v1@890,1685.94 ; v1(571.47,572.49) 625.89,572.49 ccw(c625.89,596.14) 642.62,579.41 cw(c688.58,533.45) 688.58,598.45 830.75,598.45 cw(c830.75,548.25) 866.25,583.75 P1.2 ; v1(920.75,1498.77) v1(1054.61,1498.77) ; v1(1318.2,861.31) v1(1488.75,861.31) ; v1(1369.31,1204.6) v1(1488.75,1204.6)
  Bottom Layer w10: P1.2 900,508.81 ccw(c910.99,508.81) 910.99,497.82 v1(927.82,497.82) v1(1063.97,497.82) 1110.04,497.82 ccw(c1110.04,538.88) 1151.1,538.88 v1(1151.1,625.95) v1(1151.1,697.74) ; v1(1054.61,1498.77) 1054.61,1463.77 ccw(c1081.21,1463.77) 1081.21,1437.17 1151.1,1437.17 ; v1(1151.1,1359.53) 1151.1,1437.17 ; v1(1196.97,1498.77) 1196.97,1463.77 cw(c1170.38,1463.77) 1170.38,1437.17 1151.1,1437.17
pads on no net: P2.7 P2.8 U3.7 U3.8 U3.9 U3.10 U3.11 U3.12 U3.13 U3.14 U3.15 U3.16 U3.17 U3.18 U3.19 U3.20 U3.21 U3.22 U3.23 U3.24 U3.26 U3.27 U3.28 U3.29 U3.30 U3.31 U3.32 U3.33 U3.34 U3.35 U3.36 U3.39 U3.40 U3.41 U3.42 U3.43 U3.44 U3.45 U3.46 U3.47 U3.48 U3.49 U3.50 U3.51 U3.57 U3.58 U3.59 U3.60 U3.61 U3.62 U3.63 U3.64 U3.65 U3.66 U3.67 U3.68 U3.70 U3.71 U3.72 U3.77 U3.78 U3.79 U3.80 U3.81 U3.82 U3.83 U3.84 U3.85 U3.86 U3.87 U3.88 U3.89 U3.92 U3.93 U3.94 U3.95 U3.96 U3.97 U3.98 U3.99 U3.100 U3.101 U3.102 U3.105 U3.106 U3.107 U3.108 U3.109 U3.110 U3.111 U3.112 U3.113 U3.114 U3.115 U3.116 U3.117 U3.120 U3.121 U3.122 U3.123 U3.124 U3.125 U3.126 U3.127 U3.128 U3.129 U3.130 U3.131 U3.132 U3.133 U3.134 U3.135 U3.136 U3.137 U3.138 U3.139 U3.141 U3.144 U4.2

## Polygon pours and split planes (outlines as drawn)
GNDB on Bottom Layer "Bottom Layer-GNDB" (solid, remove dead copper, pour order 0): 405,2100 405,375 1585,375 1585,2100

## Keep-outs
Keep-Out Layer:
  the board outline again, w10

## Other copper
Bottom Layer:
  pour cut-out: 567.93,1640.89 cw(c567.93,1738.94) 469.88,1738.94 469.88,1613.6
  pour cut-out: 1400.92,604.87 1387.34,618.45 ccw(c1361.03,592.14) 1361.03,629.35 cw(c1369.9,629.35) 1363.63,635.61 1381.81,653.8
  pour cut-out: 1352.41,963.5 1330.51,921.6 1359.01,920.58

## Silkscreen, mask and mechanical layers (free items; w line width, h text height)
Top Overlay:
  drawing of 1868 lines, arcs and shapes, not listed
  text "UC3C TEST BOARD" at 1003.56,1654.04 h50
  text "05/14/2018 V1.0 REV 212" at 1003.32,1614.47 h40
  text "S. Damkjar" at 1002.23,1575.63 h40
Bottom Overlay:
  rectangle: 625,875 1375,1375
  text "3V3" at 819.47,618.04 h60 r90
  text "VDUT" at 919.47,618.04 h60 r90
  text "TXS" at 1019.47,618.04 h60 r90
  text "RXS" at 1119.47,618.04 h60 r90
  text "GND" at 1219.47,618.04 h60 r90